# EAGLE board v0.1sch (EAGLE 9.6.2)
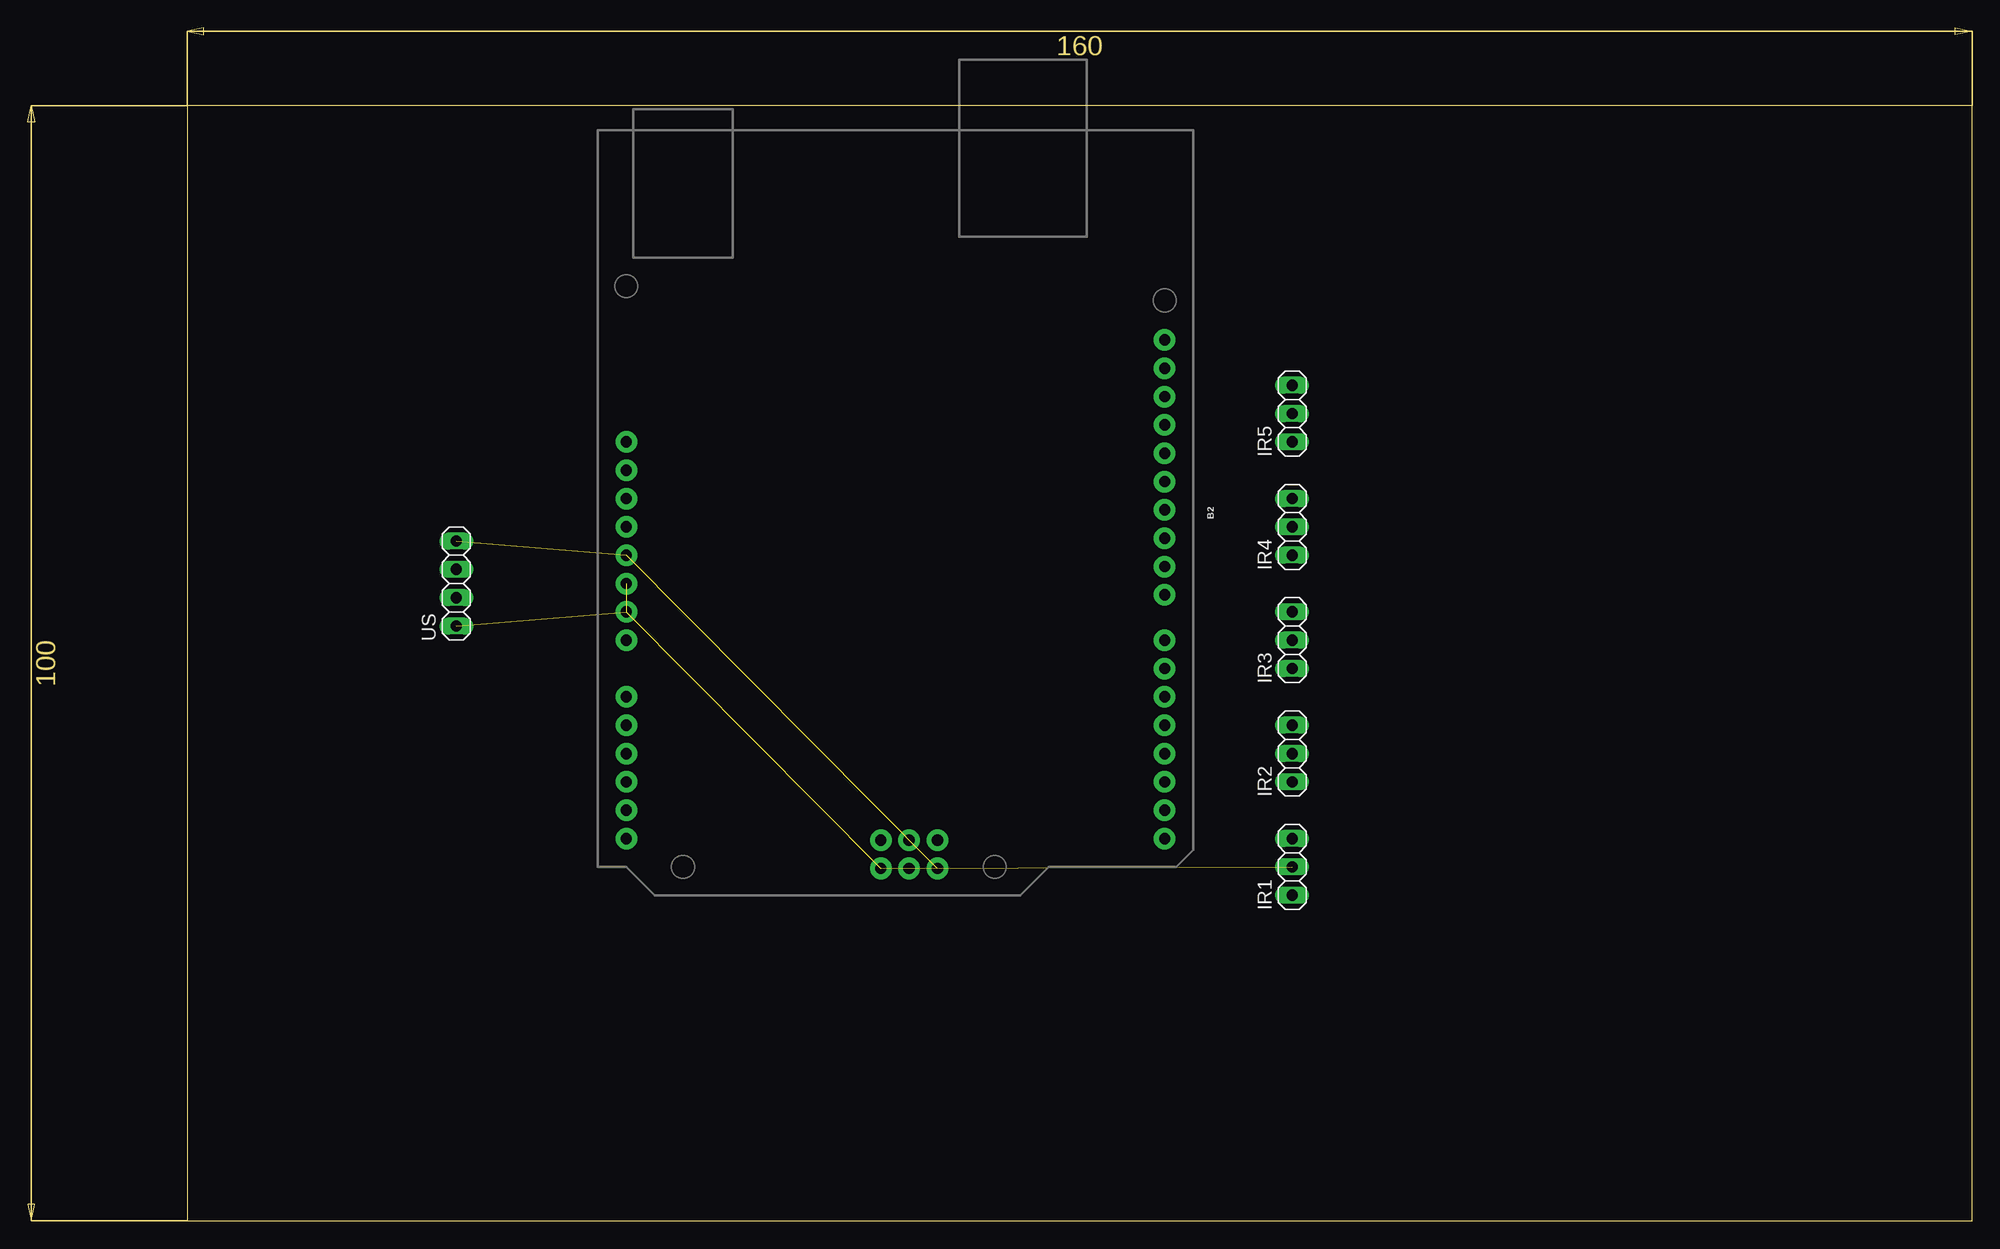
[diagram p0: board, top side]
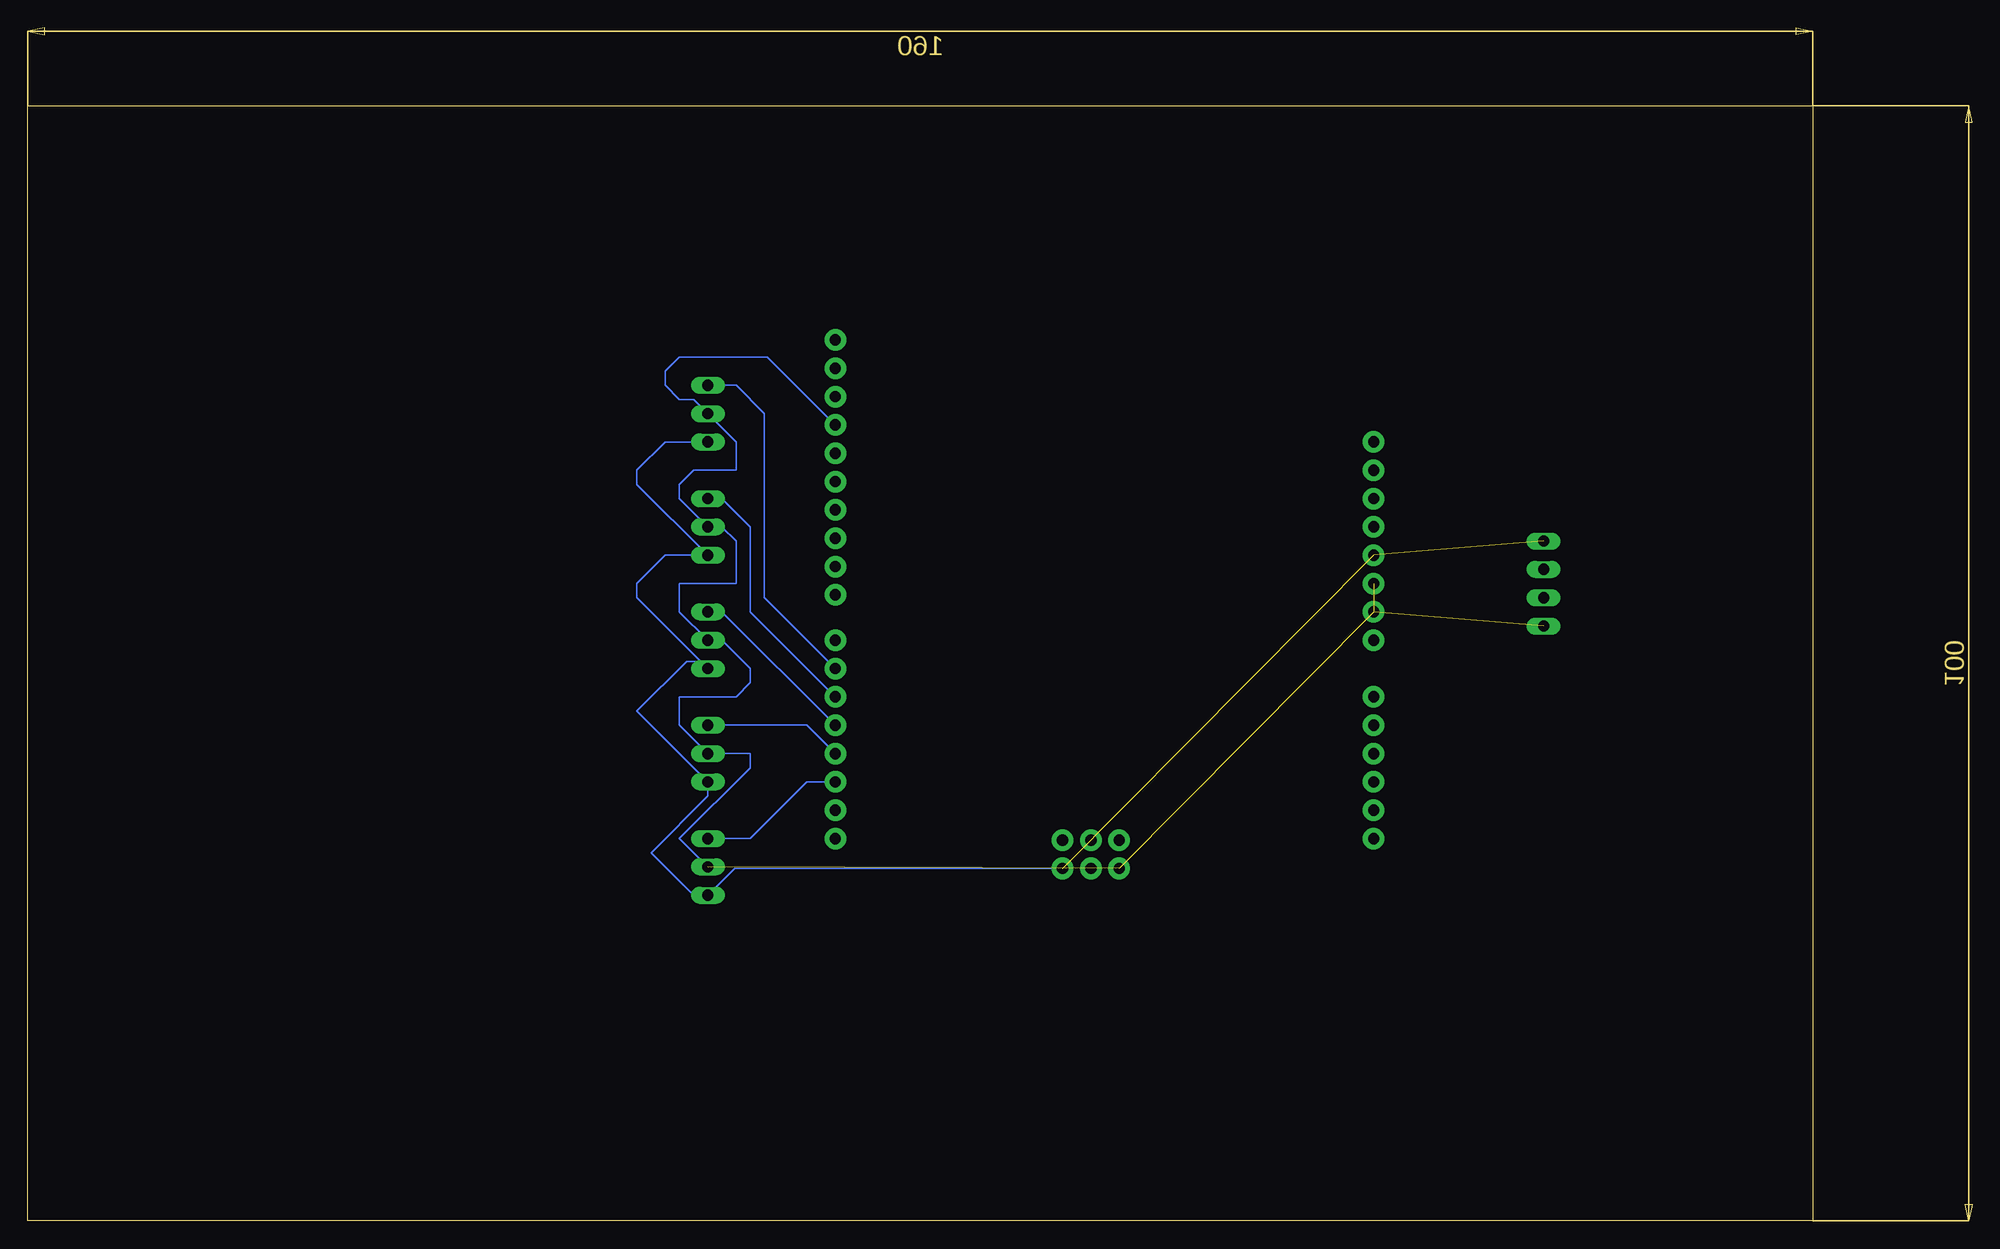
[diagram p1: board, bottom side, seen from below]

Size 160 x 100 mm. Coordinates in mm from the lower left corner, seen from the top.
Outline: 0,0 160,0 160,100 0,100 0,0
Copper layers (1*16): Top 0.035mm / dielectric 1.5mm / Bottom 0.035mm
Design rules "default": minimum track width 6mil, minimum drill 0.35mm, track to track 6mil, track to pad 6mil, pad to pad 6mil, via to via 6mil, smd to smd 6mil, copper to edge 40mil, drill to drill 6mil, minimum pad ring 10mil, minimum via ring 8mil, stop-mask expansion 4mil, vias tented up to drill 0mil, thermal gap 10mil

## Footprints (pad centres in the part's own frame; a part is rotated, then mirrored left to right if it is on the bottom)
ARDUINO_R3_NO_HOLES = drill 1.016 pad 1.93: 3.3V 1.27,-24.13; 5V 3.81,-24.13; A0 16.51,-24.13; A1 19.05,-24.13; A2 21.59,-24.13; A3 24.13,-24.13; A4 26.67,-24.13; A5 29.21,-24.13; AREF -10.414,24.13; D0 29.21,24.13; D1 26.67,24.13; D2 24.13,24.13; D3 21.59,24.13; D4 19.05,24.13; D5 16.51,24.13; D6 13.97,24.13; D7 11.43,24.13; D8 7.366,24.13; D9 4.826,24.13; D10 2.286,24.13; D11 -0.254,24.13; D12 -2.794,24.13; D13 -5.334,24.13; GND@1 6.35,-24.13; GND@2 8.89,-24.13; GND@3 -7.874,24.13; GND@4 31.89,-1.32; IOREF -3.81,-24.13; MISO 29.35,3.76; MOSI 31.89,1.22; NC -6.35,-24.13; RESET@1 -1.27,-24.13; RESET@2 29.35,-1.32; SCK 29.35,1.22; SCL -15.494,24.13; SDA -12.954,24.13; VCC 31.89,3.76; VIN 11.43,-24.13
1X02 = drill 1.016 long: 1 -1.27,0; 2 1.27,0
1X05 = drill 1.016 long: 1 -5.08,0; 2 -2.54,0; 3 0,0; 4 2.54,0; 5 5.08,0
1X06 = drill 1.016 long: 1 -6.35,0; 2 -3.81,0; 3 -1.27,0; 4 1.27,0; 5 3.81,0; 6 6.35,0
1X03 = drill 1.016 long: 1 -2.54,0; 2 0,0; 3 2.54,0
1X04 = drill 1.016 long: 1 -3.81,0; 2 -1.27,0; 3 1.27,0; 4 3.81,0

## Placement (x,y rotation side)
B2  ARDUINO_UNO_R3NO_HOLES  [ARDUINO_R3_NO_HOLES]  63.5,63.5 270 top
BLUETOOTH  [1X02]  -13.97,-41.91 0 top  (outside the outline)
CS1  [1X05]  -10.16,-48.26 0 top  (outside the outline)
CS2  [1X05]  -10.16,-54.61 0 top  (outside the outline)
H-BRIDGE  [1X06]  -8.89,-60.96 0 top  (outside the outline)
IR1  [1X03]  99.06,31.75 90 top
IR2  [1X03]  99.06,41.91 90 top
IR3  [1X03]  99.06,52.07 90 top
IR4  [1X03]  99.06,62.23 90 top
IR5  [1X03]  99.06,72.39 90 top
US  [1X04]  24.13,57.15 90 top

## Library data of the parts
B2 = SparkFun-Boards
BLUETOOTH CS1 CS2 H-BRIDGE IR1-IR5 US = pinhead

## Nets
5V: B2.5V B2.VCC IR1.1 IR2.1 IR3.1 IR4.1 IR5.1 US.4
GND: B2.GND@1 B2.GND@2 B2.GND@3 B2.GND@4 IR1.2 IR2.2 IR3.2 IR4.2 IR5.2 US.1
N$1: B2.D2 IR1.3
N$2: US.2
N$3: US.3
N$4: B2.D3 IR2.3
N$5: H-BRIDGE.1
N$6: H-BRIDGE.2
N$7: H-BRIDGE.3
N$8: H-BRIDGE.4
N$9: H-BRIDGE.5
N$10: H-BRIDGE.6
N$11: CS2.1
N$12: CS2.2
N$13: CS2.3
N$14: CS2.4
N$15: CS2.5
N$16: CS1.1
N$17: CS1.2
N$18: CS1.3
N$19: CS1.4
N$20: CS1.5
N$21: B2.D4 IR3.3
N$22: B2.D5 IR4.3
N$23: B2.D6 IR5.3

## Tracks (layer width: path | path; a pad name or v marks a point on that pad's centre or on a via)
5V  (2 unrouted)
  Bottom 0.152: B2.VCC 96.66,31.61 IR1.1 100.33,29.21 104.14,33.02 99.06,38.1 IR2.1 105.41,45.72 100.97,50.16 99.69,50.16 IR3.1 105.41,55.88 105.41,57.15 102.87,59.69 IR4.1 105.41,66.04 105.41,67.31 102.87,69.85 IR5.1
GND  (4 unrouted)
  Bottom 0.152: IR1.2 101.6,34.29 95.25,40.64 95.25,41.91 IR2.2 101.6,44.45 101.6,46.99 96.52,46.99 95.25,48.26 95.25,49.53 97.79,52.07 IR3.2 101.6,54.61 101.6,57.15 96.52,57.15 96.52,60.96 97.79,62.23 IR4.2 101.6,64.77 101.6,66.04 100.33,67.31 96.52,67.31 96.52,69.85 IR5.2 100.33,73.66 101.6,73.66 102.87,74.93 102.87,76.2 101.6,77.47 93.73,77.47 B2.GND@3
N$1
  Bottom 0.152: B2.D2 90.17,39.37 95.25,34.29 IR1.3
N$4
  Bottom 0.152: B2.D3 90.17,44.45 IR2.3
N$21
  Bottom 0.152: B2.D4 97.79,54.61 IR3.3
N$22
  Bottom 0.152: B2.D5 95.25,54.61 95.25,62.23 97.79,64.77 IR4.3
N$23
  Bottom 0.152: B2.D6 93.98,55.88 93.98,72.39 96.52,74.93 IR5.3